# EAGLE board Open_ROV_Cape (EAGLE 6.2)
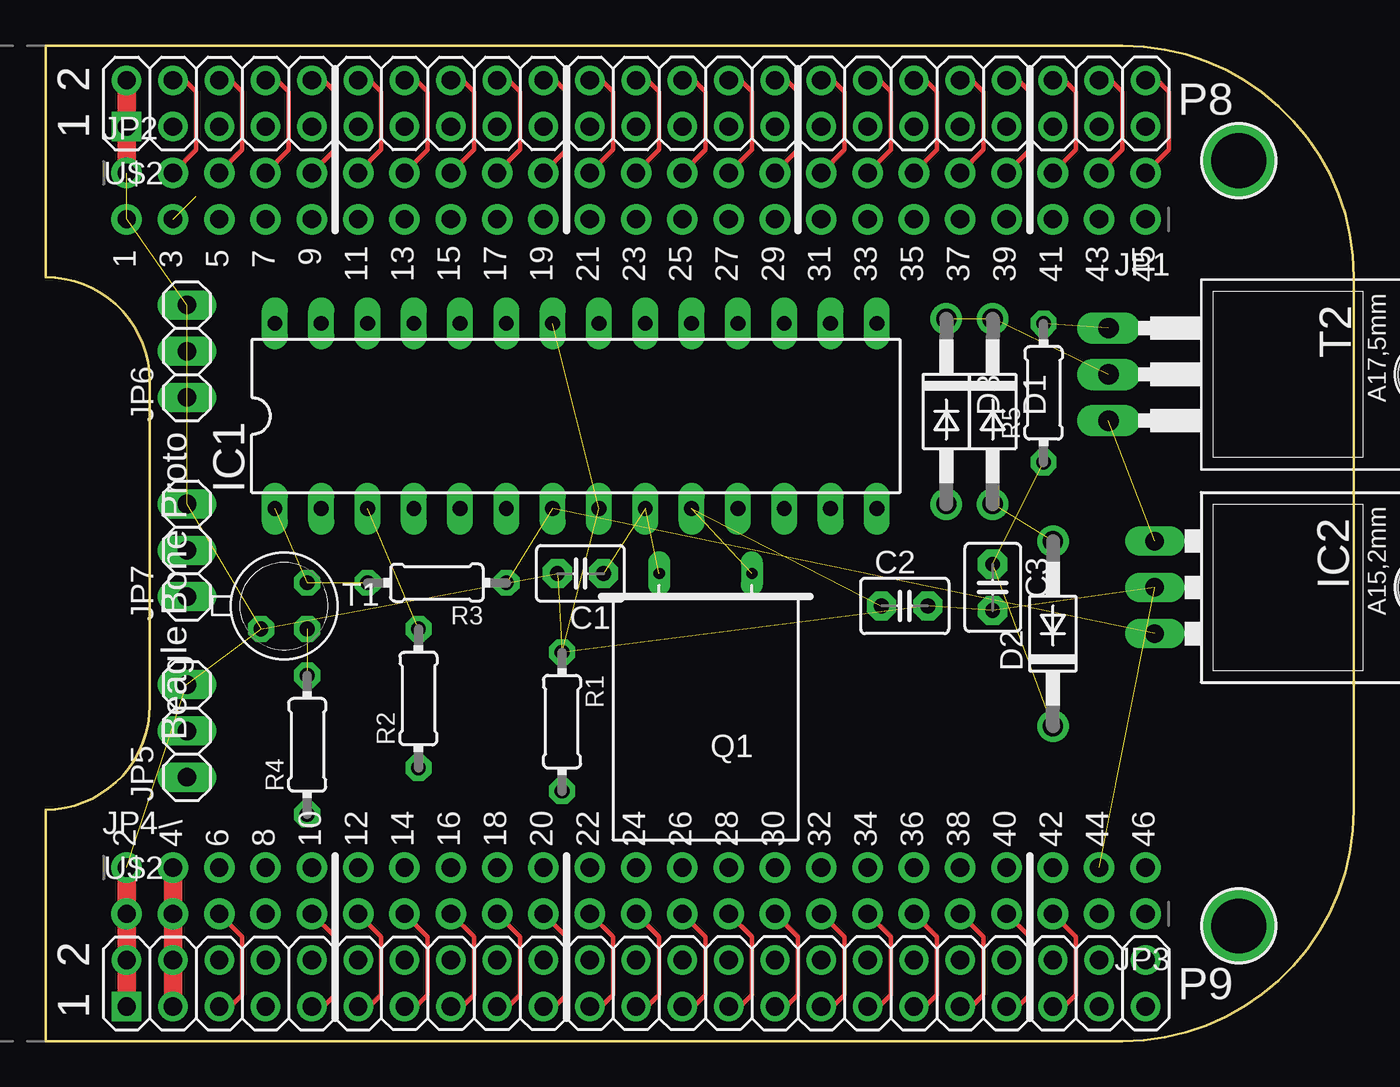
[diagram p0: board, top side]
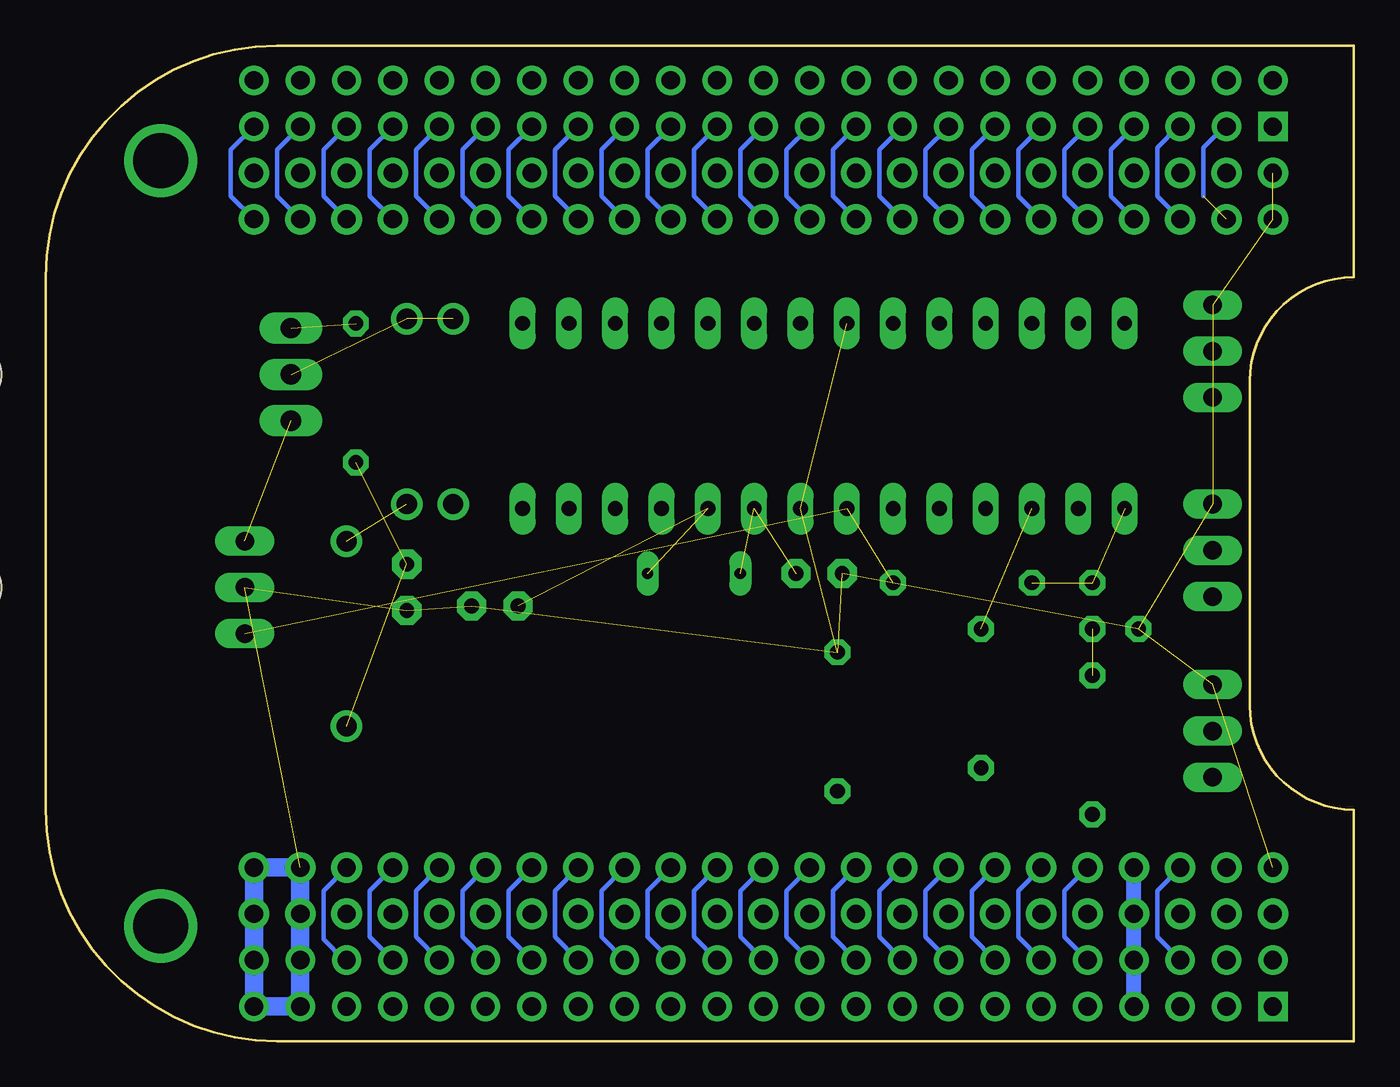
[diagram p1: board, bottom side, seen from below]

Size 71.75 x 54.61 mm. Coordinates in mm from the lower left corner, seen from the top.
Copper layers (1*16): Top 0.035mm / dielectric 1.5mm / Bottom 0.035mm
Design rules: minimum track width 10mil, minimum drill 20mil, track to track 10mil, track to pad 10mil, pad to pad 10mil, via to via 10mil, smd to smd 10mil, copper to edge 10mil, drill to drill 10mil, minimum pad ring 12mil, minimum via ring 10mil, stop-mask expansion 4mil, vias tented up to drill 25mil, thermal gap 10mil

## Footprints (pad centres in the part's own frame; a part is rotated, then mirrored left to right if it is on the bottom)
C2.5-3 = drill 0.813 pad 1.6 octagon: 1 -1.27,0; 2 1.27,0
DO41-10 = drill 1.118: A 5.08,0; C -5.08,0
DIL28-4 = drill 0.813 long: 1 -16.51,-5.08; 2 -13.97,-5.08; 3 -11.43,-5.08; 4 -8.89,-5.08; 5 -6.35,-5.08; 6 -3.81,-5.08; 7 -1.27,-5.08; 8 1.27,-5.08; 9 3.81,-5.08; 10 6.35,-5.08; 11 8.89,-5.08; 12 11.43,-5.08; 13 13.97,-5.08; 14 16.51,-5.08; 15 16.51,5.08; 16 13.97,5.08; 17 11.43,5.08; 18 8.89,5.08; 19 6.35,5.08; 20 3.81,5.08; 21 1.27,5.08; 22 -1.27,5.08; 23 -3.81,5.08; 24 -6.35,5.08; 25 -8.89,5.08; 26 -11.43,5.08; 27 -13.97,5.08; 28 -16.51,5.08
78XXL = drill 1.016 long: GND 0,-3.81; IN -2.54,-3.81; OUT 2.54,-3.81 | hole 3.302: 0,11.176
1X23_ROUND_70MIL = drill 1 pad 1.676: 1 -27.94,0; 2 -25.4,0; 3 -22.86,0; 4 -20.32,0; 5 -17.78,0; 6 -15.24,0; 7 -12.7,0; 8 -10.16,0; 9 -7.62,0; 10 -5.08,0; 11 -2.54,0; 12 0,0; 13 2.54,0; 14 5.08,0; 15 7.62,0; 16 10.16,0; 17 12.7,0; 18 15.24,0; 19 17.78,0; 20 20.32,0; 21 22.86,0; 22 25.4,0; 23 27.94,0
1X03 = drill 1.016 long: 1 -2.54,0; 2 0,0; 3 2.54,0
Q = drill 0.61 long: 1 -2.54,-7.62; 2 2.54,-7.62
0204/7 = drill 0.813 octagon: 1 -3.81,0; 2 3.81,0
TO18 = drill 0.813 octagon: 1 -1.27,-1.27; 2 1.27,-1.27; 3 1.27,1.27
TO220 = drill 1.118 long: 1 -2.54,-6.35; 2 0,-6.35; 3 2.54,-6.35 | hole 3.302: 0,11.176
BEAGLEBONE_SHIELD = drill 1 square: 1 4.445,19.05; 47 52.705,19.05 | drill 1: 2 1.905,19.05; 3 4.445,21.59; 4 1.905,21.59; 5 4.445,24.13; 6 1.905,24.13; 7 4.445,26.67; 8 1.905,26.67; 9 4.445,29.21; 10 1.905,29.21; 11 4.445,31.75; 12 1.905,31.75; 13 4.445,34.29; 14 1.905,34.29; 15 4.445,36.83; 16 1.905,36.83; 17 4.445,39.37; 18 1.905,39.37; 19 4.445,41.91; 20 1.905,41.91; 21 4.445,44.45; 22 1.905,44.45; 23 4.445,46.99; 24 1.905,46.99; 25 4.445,49.53; 26 1.905,49.53; 27 4.445,52.07; 28 1.905,52.07; 29 4.445,54.61; 30 1.905,54.61; 31 4.445,57.15; 32 1.905,57.15; 33 4.445,59.69; 34 1.905,59.69; 35 4.445,62.23; 36 1.905,62.23; 37 4.445,64.77; 38 1.905,64.77; 39 4.445,67.31; 40 1.905,67.31; 41 4.445,69.85; 42 1.905,69.85; 43 4.445,72.39; 44 1.905,72.39; 45 4.445,74.93; 46 1.905,74.93; 48 50.165,19.05; 49 52.705,21.59; 50 50.165,21.59; 51 52.705,24.13; 52 50.165,24.13; 53 52.705,26.67; 54 50.165,26.67; 55 52.705,29.21; 56 50.165,29.21; 57 52.705,31.75; 58 50.165,31.75; 59 52.705,34.29; 60 50.165,34.29; 61 52.705,36.83; 62 50.165,36.83; 63 52.705,39.37; 64 50.165,39.37; 65 52.705,41.91; 66 50.165,41.91; 67 52.705,44.45; 68 50.165,44.45; 69 52.705,46.99; 70 50.165,46.99; 71 52.705,49.53; 72 50.165,49.53; 73 52.705,52.07; 74 50.165,52.07; 75 52.705,54.61; 76 50.165,54.61; 77 52.705,57.15; 78 50.165,57.15; 79 52.705,59.69; 80 50.165,59.69; 81 52.705,62.23; 82 50.165,62.23; 83 52.705,64.77; 84 50.165,64.77; 85 52.705,67.31; 86 50.165,67.31; 87 52.705,69.85; 88 50.165,69.85; 89 52.705,72.39; 90 50.165,72.39; 91 52.705,74.93; 92 50.165,74.93
MOUNTINGHOLE_3.0_PLATEDTHIN = drill 3 pad 3.6: P$1 0,0

## Placement (x,y rotation side)
C1  [C2.5-3]  29.34,25.65 180 top
C2  [C2.5-3]  47.12,23.88 0 top
C3  [C2.5-3]  51.94,24.89 270 top
D1  1N4004  [DO41-10]  51.94,34.54 270 top
D2  1N4004  [DO41-10]  55.24,22.35 90 top
D3  1N4004  [DO41-10]  49.4,34.54 270 top
IC1  [DIL28-4]  29.08,34.29 0 top
IC2  [78XXL]  64.64,24.89 270 top
JP1  [1X23_ROUND_70MIL]  32.39,45.09 180 top
JP2  [1X23_ROUND_70MIL]  32.39,47.62 0 top
JP3  [1X23_ROUND_70MIL]  32.39,6.99 180 top
JP4  [1X23_ROUND_70MIL]  32.39,9.53 0 top
JP5  [1X03]  7.75,17.02 90 top
JP6  [1X03]  7.75,37.85 90 top
JP7  [1X03]  7.75,26.92 90 top
Q1  [Q]  36.19,18.03 180 top
R1  [0204/7]  28.32,17.53 270 top
R2  [0204/7]  20.45,18.8 90 top
R3  [0204/7]  21.46,25.15 180 top
R4  [0204/7]  14.35,16.26 90 top
R5  [0204/7]  54.74,35.56 90 top
T1  2N2222  [TO18]  13.08,23.88 0 top
T2  TIP122  [TO220]  64.64,36.58 270 top
U$2  BEAGLEBONE_OUTLINE  [BEAGLEBONE_SHIELD]  -14.61,54.61 270 top
U$22  MOUNTINGHOLE3.0THIN  [MOUNTINGHOLE_3.0_PLATEDTHIN]  65.44,48.3 0 top
U$23  MOUNTINGHOLE3.0THIN  [MOUNTINGHOLE_3.0_PLATEDTHIN]  65.44,6.32 0 top

## Library data of the parts
C1-C3 = capacitor-wima
D1-D3 = diode
IC1 = ic-package
IC2 = v-reg
JP1-JP4 U$2 U$22 U$23 = microbuilder
JP5-JP7 = pinhead
Q1 = special
R1-R5 = rcl
T1 T2 = transistor

## Nets
3.3V: JP3.22 JP4.2 U$2.49 U$2.50
5.0V: JP3.20 JP4.4 U$2.53 U$2.54
+9V: D3.A
+12V: D1.A D2.A
AGND: JP2.19 U$2.38
AVCC: JP1.4 U$2.39
GND: C1.2 C2.2 C3.2 IC1.8 IC1.22 IC2.GND JP1.23 JP2.1 JP3.1 JP3.2 JP3.23 JP4.1 JP4.22 JP4.23 JP5.3 JP6.3 JP7.3 R1.1 T1.1 U$2.1 U$2.2 U$2.47 U$2.48 U$2.89 U$2.90 U$2.91 U$2.92
N$1: IC1.2
N$2: IC1.1 R3.2 T1.3
N$3: R4.2 T1.2
N$4: JP1.20 U$2.7
N$5: JP1.19 U$2.9
N$6: JP1.18 U$2.11
N$7: JP1.17 U$2.13
N$8: JP1.16 U$2.15
N$9: JP1.15 U$2.17
N$10: JP1.14 U$2.19
N$11: JP1.13 U$2.21
N$12: JP1.12 U$2.23
N$13: JP1.11 U$2.25
N$14: JP1.10 U$2.27
N$15: JP1.9 U$2.29
N$16: JP1.8 U$2.31
N$17: JP1.7 U$2.33
N$18: JP1.6 U$2.35
N$19: JP1.5 U$2.37
N$20: R4.1
N$21: JP1.3 U$2.41
N$22: JP1.2 U$2.43
N$23: JP1.1 U$2.45
N$24: C2.1 IC1.10 Q1.1
N$25: C1.1 IC1.9 Q1.2
N$26: IC1.15
N$27: JP2.4 U$2.8
N$28: JP2.5 U$2.10
N$29: JP2.6 U$2.12
N$30: JP2.7 U$2.14
N$31: JP2.8 U$2.16
N$32: JP2.9 U$2.18
N$33: JP2.10 U$2.20
N$34: JP2.11 U$2.22
N$35: JP2.12 U$2.24
N$36: JP2.13 U$2.26
N$37: JP2.14 U$2.28
N$38: JP2.15 U$2.30
N$39: JP2.16 U$2.32
N$40: JP2.17 U$2.34
N$41: JP2.18 U$2.36
N$42: IC1.16
N$43: JP2.20 U$2.40
N$44: JP2.21 U$2.42
N$45: JP2.22 U$2.44
N$46: JP2.23 U$2.46
N$47: JP1.22 U$2.3
N$48: JP1.21 U$2.5
N$49: JP3.21 U$2.51
N$50: JP2.2 U$2.4
N$51: JP3.19 U$2.55
N$52: JP3.18 U$2.57
N$53: JP3.17 U$2.59
N$54: JP3.16 U$2.61
N$55: JP3.15 U$2.63
N$56: JP3.14 U$2.65
N$57: JP3.13 U$2.67
N$58: JP3.12 U$2.69
N$59: JP3.11 U$2.71
N$60: JP3.10 U$2.73
N$61: JP3.9 U$2.75
N$62: JP3.8 U$2.77
N$63: JP3.7 U$2.79
N$64: JP3.6 U$2.81
N$65: JP3.5 U$2.83
N$66: JP3.4 U$2.85
N$67: JP3.3 U$2.87
N$68: JP2.3 U$2.6
N$69: JP4.21 U$2.88
N$70: IC1.17
N$71: C3.1 D2.C R5.1
N$72: JP4.3 U$2.52
N$73: R5.2 T2.1
N$74: JP4.5 U$2.56
N$75: JP4.6 U$2.58
N$76: JP4.7 U$2.60
N$77: JP4.8 U$2.62
N$78: JP4.9 U$2.64
N$79: JP4.10 U$2.66
N$80: JP4.11 U$2.68
N$81: JP4.12 U$2.70
N$82: JP4.13 U$2.72
N$83: JP4.14 U$2.74
N$84: JP4.15 U$2.76
N$85: JP4.16 U$2.78
N$86: JP4.17 U$2.80
N$87: JP4.18 U$2.82
N$88: JP4.19 U$2.84
N$89: JP4.20 U$2.86
N$90: D1.C D3.C T2.2
N$91: IC2.IN T2.3
N$92: JP5.1
N$93: JP6.1
N$94: JP7.1
N$95: R1.2 R2.1
N$96: IC1.3 R2.2
VCC: IC1.7 IC2.OUT R3.1

## Tracks (layer width: path | path; a pad name or v marks a point on that pad's centre or on a via)
3.3V
  Top 1.016: U$2.49 U$2.50 JP3.22 JP4.2
5.0V
  Bottom 0.813: U$2.53 U$2.54 JP3.20 JP4.4
+12V  (1 unrouted)
AGND
  Top 0.254: U$2.38 50.8,52.7 51.44,52.07 51.44,48.9 JP2.19
AVCC
  Bottom 0.254: U$2.39 53.97,48.9 53.97,46.35 JP1.4
GND  (14 unrouted)
  Top 1.016: U$2.47 U$2.48 JP3.23 JP4.1 | U$2.2 U$2.1 JP2.1
  Bottom 1.016: U$2.92 U$2.91 U$2.89 U$2.90 JP3.2 JP4.22 JP4.23 JP3.1 U$2.92
N$2  (2 unrouted)
N$3  (1 unrouted)
N$4
  Bottom 0.254: U$2.7 13.34,48.9 13.34,46.35 JP1.20
N$5
  Bottom 0.254: U$2.9 15.88,48.9 15.88,46.35 JP1.19
N$6
  Bottom 0.254: U$2.11 18.42,48.9 18.42,46.35 JP1.18
N$7
  Bottom 0.254: U$2.13 20.96,48.9 20.96,46.35 JP1.17
N$8
  Bottom 0.254: U$2.15 23.5,48.9 23.5,46.35 JP1.16
N$9
  Bottom 0.254: U$2.17 26.04,48.9 26.04,46.35 JP1.15
N$10
  Bottom 0.254: U$2.19 28.57,48.9 28.57,46.35 JP1.14
N$11
  Bottom 0.254: U$2.21 31.11,48.9 31.11,46.35 JP1.13
N$12
  Bottom 0.254: U$2.23 33.66,48.9 33.66,46.35 JP1.12
N$13
  Bottom 0.254: U$2.25 36.19,48.9 36.19,46.35 JP1.11
N$14
  Bottom 0.254: U$2.27 38.73,48.9 38.73,46.35 JP1.10
N$15
  Bottom 0.254: U$2.29 41.28,48.9 41.28,46.35 JP1.9
N$16
  Bottom 0.254: U$2.31 43.81,48.9 43.81,46.35 JP1.8
N$17
  Bottom 0.254: U$2.33 46.36,48.9 46.36,46.35 JP1.7
N$18
  Bottom 0.254: U$2.35 48.89,48.9 48.89,46.35 JP1.6
N$19
  Bottom 0.254: U$2.37 51.44,48.9 51.44,46.35 JP1.5
N$21
  Bottom 0.254: U$2.41 56.52,48.9 56.52,46.35 JP1.3
N$22
  Bottom 0.254: U$2.43 59.05,48.9 59.05,46.35 JP1.2
N$23
  Bottom 0.254: U$2.45 61.59,48.9 61.59,46.35 JP1.1
N$24  (2 unrouted)
N$25  (2 unrouted)
N$27
  Top 0.254: U$2.8 12.7,52.7 13.34,52.07 13.34,48.9 JP2.4
N$28
  Top 0.254: U$2.10 15.24,52.7 15.88,52.07 15.88,48.9 JP2.5
N$29
  Top 0.254: U$2.12 17.78,52.7 18.42,52.07 18.42,48.9 JP2.6
N$30
  Top 0.254: U$2.14 20.32,52.7 20.96,52.07 20.96,48.9 JP2.7
N$31
  Top 0.254: U$2.16 22.86,52.7 23.5,52.07 23.5,48.9 JP2.8
N$32
  Top 0.254: U$2.18 25.4,52.7 26.04,52.07 26.04,48.9 JP2.9
N$33
  Top 0.254: U$2.20 27.94,52.7 28.57,52.07 28.57,48.9 JP2.10
N$34
  Top 0.254: U$2.22 30.48,52.7 31.11,52.07 31.11,48.9 JP2.11
N$35
  Top 0.254: U$2.24 33.02,52.7 33.66,52.07 33.66,48.9 JP2.12
N$36
  Top 0.254: U$2.26 35.56,52.7 36.19,52.07 36.19,48.9 JP2.13
N$37
  Top 0.254: U$2.28 38.1,52.7 38.73,52.07 38.73,48.9 JP2.14
N$38
  Top 0.254: U$2.30 40.64,52.7 41.28,52.07 41.28,48.9 JP2.15
N$39
  Top 0.254: U$2.32 43.18,52.7 43.81,52.07 43.81,48.9 JP2.16
N$40
  Top 0.254: U$2.34 45.72,52.7 46.36,52.07 46.36,48.9 JP2.17
N$41
  Top 0.254: U$2.36 48.26,52.7 48.89,52.07 48.89,48.9 JP2.18
N$43
  Top 0.254: U$2.40 53.34,52.7 53.97,52.07 53.97,48.9 JP2.20
N$44
  Top 0.254: U$2.42 55.88,52.7 56.52,52.07 56.52,48.9 JP2.21
N$45
  Top 0.254: U$2.44 58.42,52.7 59.05,52.07 59.05,48.9 JP2.22
N$46
  Top 0.254: U$2.46 60.96,52.7 61.59,52.07 61.59,48.9 JP2.23
N$47  (1 unrouted)
  Bottom 0.254: U$2.3 7.11,50.16 8.25,49.02 8.25,46.35
N$48
  Bottom 0.254: U$2.5 9.65,50.16 10.79,49.02 10.79,46.35 JP1.21
N$49
  Top 0.254: U$2.51 10.16,1.91 10.79,2.54 10.79,5.71 JP3.21
N$50
  Top 0.254: U$2.4 7.62,52.7 8.25,52.07 8.25,48.9 JP2.2
N$51
  Top 0.254: U$2.55 15.24,1.91 15.88,2.54 15.88,5.71 JP3.19
N$52
  Top 0.254: U$2.57 17.78,1.91 18.42,2.54 18.42,5.71 JP3.18
N$53
  Top 0.254: U$2.59 20.32,1.91 20.96,2.54 20.96,5.71 JP3.17
N$54
  Top 0.254: U$2.61 22.86,1.91 23.5,2.54 23.5,5.71 JP3.16
N$55
  Top 0.254: U$2.63 25.4,1.91 26.04,2.54 26.04,5.71 JP3.15
N$56
  Top 0.254: U$2.65 27.94,1.91 28.57,2.54 28.57,5.71 JP3.14
N$57
  Top 0.254: U$2.67 30.48,1.91 31.11,2.54 31.11,5.71 JP3.13
N$58
  Top 0.254: U$2.69 33.02,1.91 33.66,2.54 33.66,5.71 JP3.12
N$59
  Top 0.254: U$2.71 35.56,1.91 36.19,2.54 36.19,5.71 JP3.11
N$60
  Top 0.254: U$2.73 38.1,1.91 38.73,2.54 38.73,5.71 JP3.10
N$61
  Top 0.254: U$2.75 40.64,1.91 41.28,2.54 41.28,5.71 JP3.9
N$62
  Top 0.254: U$2.77 43.18,1.91 43.81,2.54 43.81,5.71 JP3.8
N$63
  Top 0.254: U$2.79 45.72,1.91 46.36,2.54 46.36,5.71 JP3.7
N$64
  Top 0.254: U$2.81 48.26,1.91 48.89,2.54 48.89,5.71 JP3.6
N$65
  Top 0.254: U$2.83 50.8,1.91 51.44,2.54 51.44,5.71 JP3.5
N$66
  Top 0.254: U$2.85 53.34,1.91 53.97,2.54 53.97,5.71 JP3.4
N$67
  Top 0.254: U$2.87 55.88,1.91 56.52,2.54 56.52,5.71 JP3.3
N$68
  Top 0.254: U$2.6 10.16,52.7 10.79,52.07 10.79,48.9 JP2.3
N$69
  Bottom 0.254: U$2.88 55.37,4.45 56.52,5.59 56.52,8.26 JP4.21
N$71  (2 unrouted)
N$72
  Bottom 0.254: JP4.3 10.79,8.26 10.79,5.71 U$2.52
N$73  (1 unrouted)
N$74
  Bottom 0.254: JP4.5 15.88,8.26 15.88,5.71 U$2.56
N$75
  Bottom 0.254: JP4.6 18.42,8.26 18.42,5.71 U$2.58
N$76
  Bottom 0.254: JP4.7 20.96,8.26 20.96,5.71 U$2.60
N$77
  Bottom 0.254: JP4.8 23.5,8.26 23.5,5.71 U$2.62
N$78
  Bottom 0.254: JP4.9 26.04,8.26 26.04,5.71 U$2.64
N$79
  Bottom 0.254: JP4.10 28.57,8.26 28.57,5.71 U$2.66
N$80
  Bottom 0.254: JP4.11 31.11,8.26 31.11,5.71 U$2.68
N$81
  Bottom 0.254: JP4.12 33.66,8.26 33.66,5.71 U$2.70
N$82
  Bottom 0.254: JP4.13 36.19,8.26 36.19,5.71 U$2.72
N$83
  Bottom 0.254: JP4.14 38.73,8.26 38.73,5.71 U$2.74
N$84
  Bottom 0.254: JP4.15 41.28,8.26 41.28,5.71 U$2.76
N$85
  Bottom 0.254: JP4.16 43.81,8.26 43.81,5.71 U$2.78
N$86
  Bottom 0.254: JP4.17 46.36,8.26 46.36,5.71 U$2.80
N$87
  Bottom 0.254: JP4.18 48.89,8.26 48.89,5.71 U$2.82
N$88
  Bottom 0.254: JP4.19 51.44,8.26 51.44,5.71 U$2.84
N$89
  Bottom 0.254: JP4.20 53.97,8.26 53.97,5.71 U$2.86
N$90  (2 unrouted)
N$91  (1 unrouted)
N$95  (1 unrouted)
N$96  (1 unrouted)
VCC  (2 unrouted)

## Text on the board
tPlace: 2 | P8 | 1 | 9 | 1 | 3 | 5 | 7 | 11 | 13 | 15 | 17 | 19 | 21 | 23 | 25 | 27 | 29 | 31 | 33 | 35 | 37 | 39 | 41 | 43 | 45 | Beagle Bone Proto | 2 | 4\ | 6 | 8 | 10 | 12 | 14 | 16 | 18 | 20 | 22 | 24 | 26 | 28 | 30 | 32 | 34 | 36 | 38 | 40 | 42 | 44 | 46 | 2 | P9 | 1